# EAGLE board ISensor brd V2.1 (EAGLE 7.2.0)
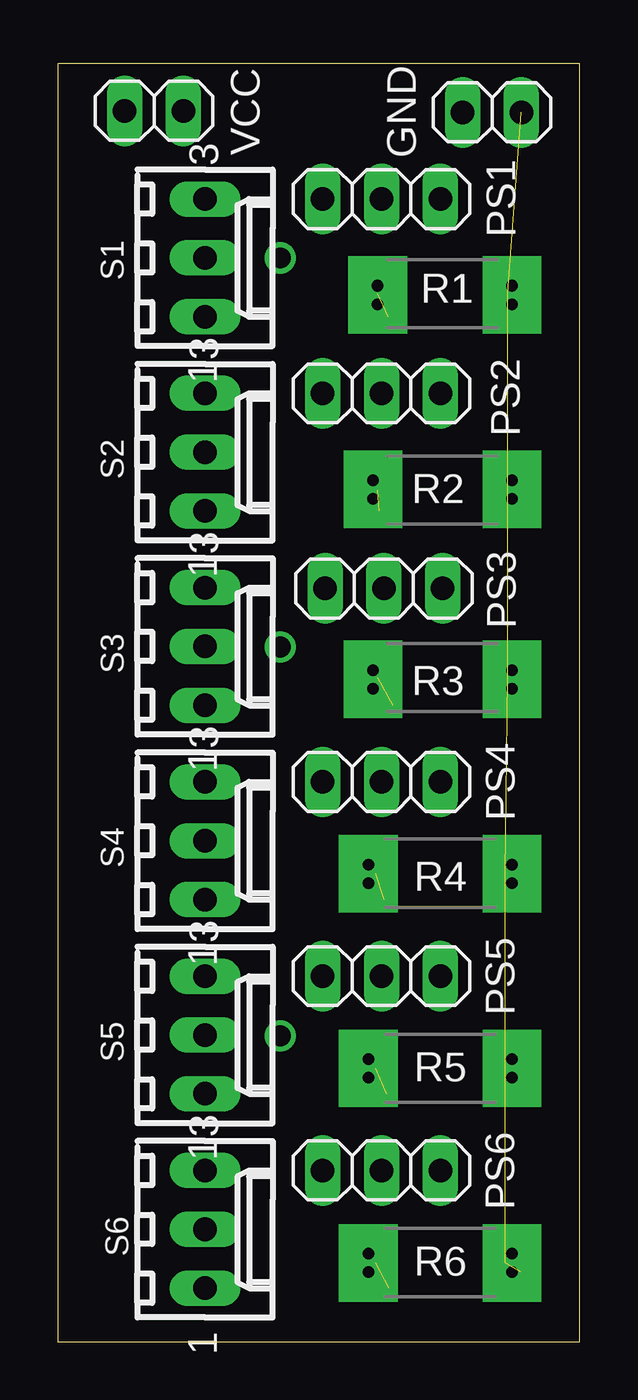
[diagram p0: board, top side]
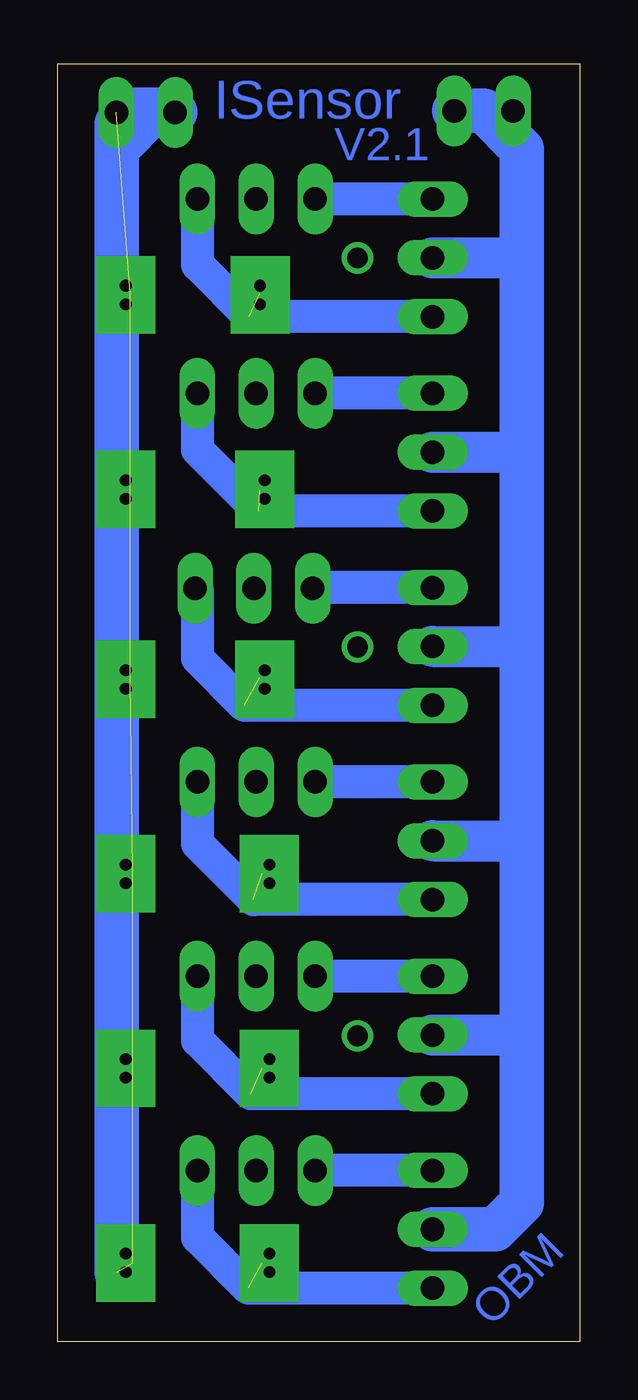
[diagram p1: board, bottom side, seen from below]

Size 22.53 x 55.18 mm. Coordinates in mm from the lower left corner, seen from the top.
Outline: 0,0 22.53,0 22.53,55.18 0,55.18 0,0
Copper layers (1*16): Top 0.035mm / dielectric 1.5mm / Bottom 0.035mm
Design rules "default": minimum track width 10mil, minimum drill 24mil, track to track 8mil, track to pad 8mil, pad to pad 8mil, via to via 8mil, smd to smd 8mil, copper to edge 40mil, drill to drill 8mil, minimum pad ring 10mil, minimum via ring 8mil, stop-mask expansion 4mil, vias tented up to drill 0mil, thermal gap 10mil

## Footprints (pad centres in the part's own frame; a part is rotated, then mirrored left to right if it is on the bottom)
1X02 = drill 1.016 long: 1 -1.27,0; 2 1.27,0
1X03 = drill 1.016 long: 1 -2.54,0; 2 0,0; 3 2.54,0
R2512 = smd 1.8 x 3.2: 1 -2.8,0; 2 2.8,0
6410-03 = drill 1.016 long: 1 2.54,0; 2 0,0; 3 -2.54,0

## Placement (x,y rotation side)
GND  [1X02]  18.74,53.09 0 top
PS1  [1X03]  13.97,49.34 180 top
PS2  [1X03]  13.97,40.95 180 top
PS3  [1X03]  14.07,32.52 180 top
PS4  [1X03]  13.97,24.17 180 top
PS5  [1X03]  13.97,15.78 180 top
PS6  [1X03]  13.97,7.39 180 top
R1  [R2512]  16.61,45.26 180 top
R2  [R2512]  16.61,36.77 180 top
R3  [R2512]  16.61,28.68 180 top
R4  [R2512]  16.51,20.23 180 top
R5  [R2512]  16.51,11.8 180 top
R6  [R2512]  16.51,3.41 180 top
S1  22-27-2031-03  [6410-03]  6.35,46.8 270 top
S2  22-27-2031-03  [6410-03]  6.35,38.41 270 top
S3  22-27-2031-03  [6410-03]  6.35,30.02 270 top
S4  22-27-2031-03  [6410-03]  6.35,21.63 270 top
S5  22-27-2031-03  [6410-03]  6.35,13.24 270 top
S6  22-27-2031-03  [6410-03]  6.35,4.85 270 top
VCC  [1X02]  4.15,53.15 180 top

## Library data of the parts
GND PS1-PS6 VCC = pinhead
R1-R6 = resistor
S1-S6 = con-molex; OC_FARNELL: unknown; OC_NEWARK: unknown

## Nets
N$1: PS1.3 S1.3
N$2: PS1.1 R1.2 S1.1
N$4: PS2.1 R2.2 S2.1
N$5: PS3.3 S3.3
N$6: PS3.1 R3.2 S3.1
N$7: PS4.3 S4.3
N$8: PS4.1 R4.2 S4.1
N$11: PS5.3 S5.3
N$12: PS5.1 R5.2 S5.1
N$13: PS6.3 S6.3
N$14: PS6.1 R6.2 S6.1
N$37: GND.1 GND.2 R1.1 R2.1 R3.1 R4.1 R5.1 R6.1
PS2: PS2.3 S2.3
VCC: S1.2 S2.2 S3.2 S4.2 S5.2 S6.2 VCC.1 VCC.2

## Tracks (layer width: path | path; a pad name or v marks a point on that pad's centre or on a via)
N$1
  Bottom 1.422: S1.3 PS1.3
N$2  (1 unrouted)
  Bottom 1.422: S1.1 14.26,44.26 16.5,46.5 PS1.1
N$3  (via drill 0.9 pad 1.27)
  other vias: 9.6,30
N$4  (1 unrouted)
  Bottom 1.422: S2.1 13.87,35.87 16.5,38.5 PS2.1
N$5
  Bottom 1.422: S3.3 11.49,32.56 PS3.3
N$6  (1 unrouted)
  Bottom 1.422: S3.1 14.48,27.48 16.5,29.5 16.5,32.41 PS3.1
N$7
  Bottom 1.422: S4.3 PS4.3
N$8  (1 unrouted)
  Bottom 1.422: S4.1 14.09,19.09 16.5,21.5 PS4.1
N$9  (via drill 0.5 pad 2.54)
  other vias: 13.4,3.8
N$10  (via drill 0.5 pad 2.54)
  other vias: 13.4,3
N$11
  Bottom 1.422: S5.3 PS5.3
N$12  (1 unrouted)
  Bottom 1.422: S5.1 14.2,10.7 16.5,13 PS5.1
N$13
  Bottom 1.422: S6.3 PS6.3
N$14  (1 unrouted)
  Bottom 1.422: S6.1 14.31,2.31 16.5,4.5 PS6.1
N$15  (via drill 0.5 pad 2.54)
  other vias: 19.6,3.8
N$16  (via drill 0.5 pad 2.54)
  other vias: 19.6,3
N$17  (via drill 0.5 pad 2.54)
  other vias: 13.4,12.2
N$18  (via drill 0.5 pad 2.54)
  other vias: 13.4,11.4
N$19  (via drill 0.5 pad 2.54)
  other vias: 19.6,12.2
N$20  (via drill 0.5 pad 2.54)
  other vias: 19.6,11.4
N$21  (via drill 0.5 pad 2.54)
  other vias: 13.4,20.6
N$22  (via drill 0.5 pad 2.54)
  other vias: 13.4,19.8
N$23  (via drill 0.5 pad 2.54)
  other vias: 19.6,20.6
N$24  (via drill 0.5 pad 2.54)
  other vias: 19.6,19.8
N$25  (via drill 0.5 pad 2.54)
  other vias: 13.6,29
N$26  (via drill 0.5 pad 2.54)
  other vias: 13.6,28.2
N$27  (via drill 0.5 pad 2.54)
  other vias: 19.6,29
N$28  (via drill 0.5 pad 2.54)
  other vias: 19.6,28.2
N$29  (via drill 0.5 pad 2.54)
  other vias: 13.6,37.2
N$30  (via drill 0.5 pad 2.54)
  other vias: 13.6,36.4
N$31  (via drill 0.5 pad 2.54)
  other vias: 19.6,37.2
N$32  (via drill 0.5 pad 2.54)
  other vias: 19.6,36.4
N$33  (via drill 0.5 pad 2.54)
  other vias: 13.8,45.6
N$34  (via drill 0.5 pad 2.54)
  other vias: 13.8,44.8
N$35  (via drill 0.5 pad 2.54)
  other vias: 19.6,45.6
N$36  (via drill 0.5 pad 2.54)
  other vias: 19.6,44.8
N$37  (7 unrouted)
  Bottom 1.93: 17.6,53.2 19.4,53.2 20,52.6 20,51.5 | GND.1 18.41,53.09 20,51.5 | 20,51.5 20,50.8 20,3
N$38  (via drill 0.9 pad 1.27)
  other vias: 9.6,46.8
N$39  (via drill 0.9 pad 1.27)
  other vias: 9.6,13.2
PS2
  Bottom 1.422: S2.3 PS2.3
VCC
  Bottom 1.422: 4.15,53.15 VCC.2
  Bottom 1.778: S1.2 2.7,46.8 2.5,47 | S2.2 2.91,38.41 2.5,38 | S3.2 2.52,30.02 2.5,30 | S4.2 2.63,21.63 2.5,21.5 | S5.2 2.74,13.24 2.5,13
  Bottom 1.93: VCC.1 4.15,53.15 2.5,51.5 2.5,47 2.5,38 2.5,30 2.5,21.5 2.5,13 2.5,6 3.65,4.85 S6.2

## Text on the board
Bottom: ISensor | V2.1 | OBM